# Altium PCB Buck.PcbDoc
Units mm, origin at the board's own origin, x right, y up, seen from the top; angles counter-clockwise.
Board outline 75.56 x 44.96 mm, 2 copper layers (Top Layer, Bottom Layer); 29 components, 16 nets, 87 pads, 62 vias.
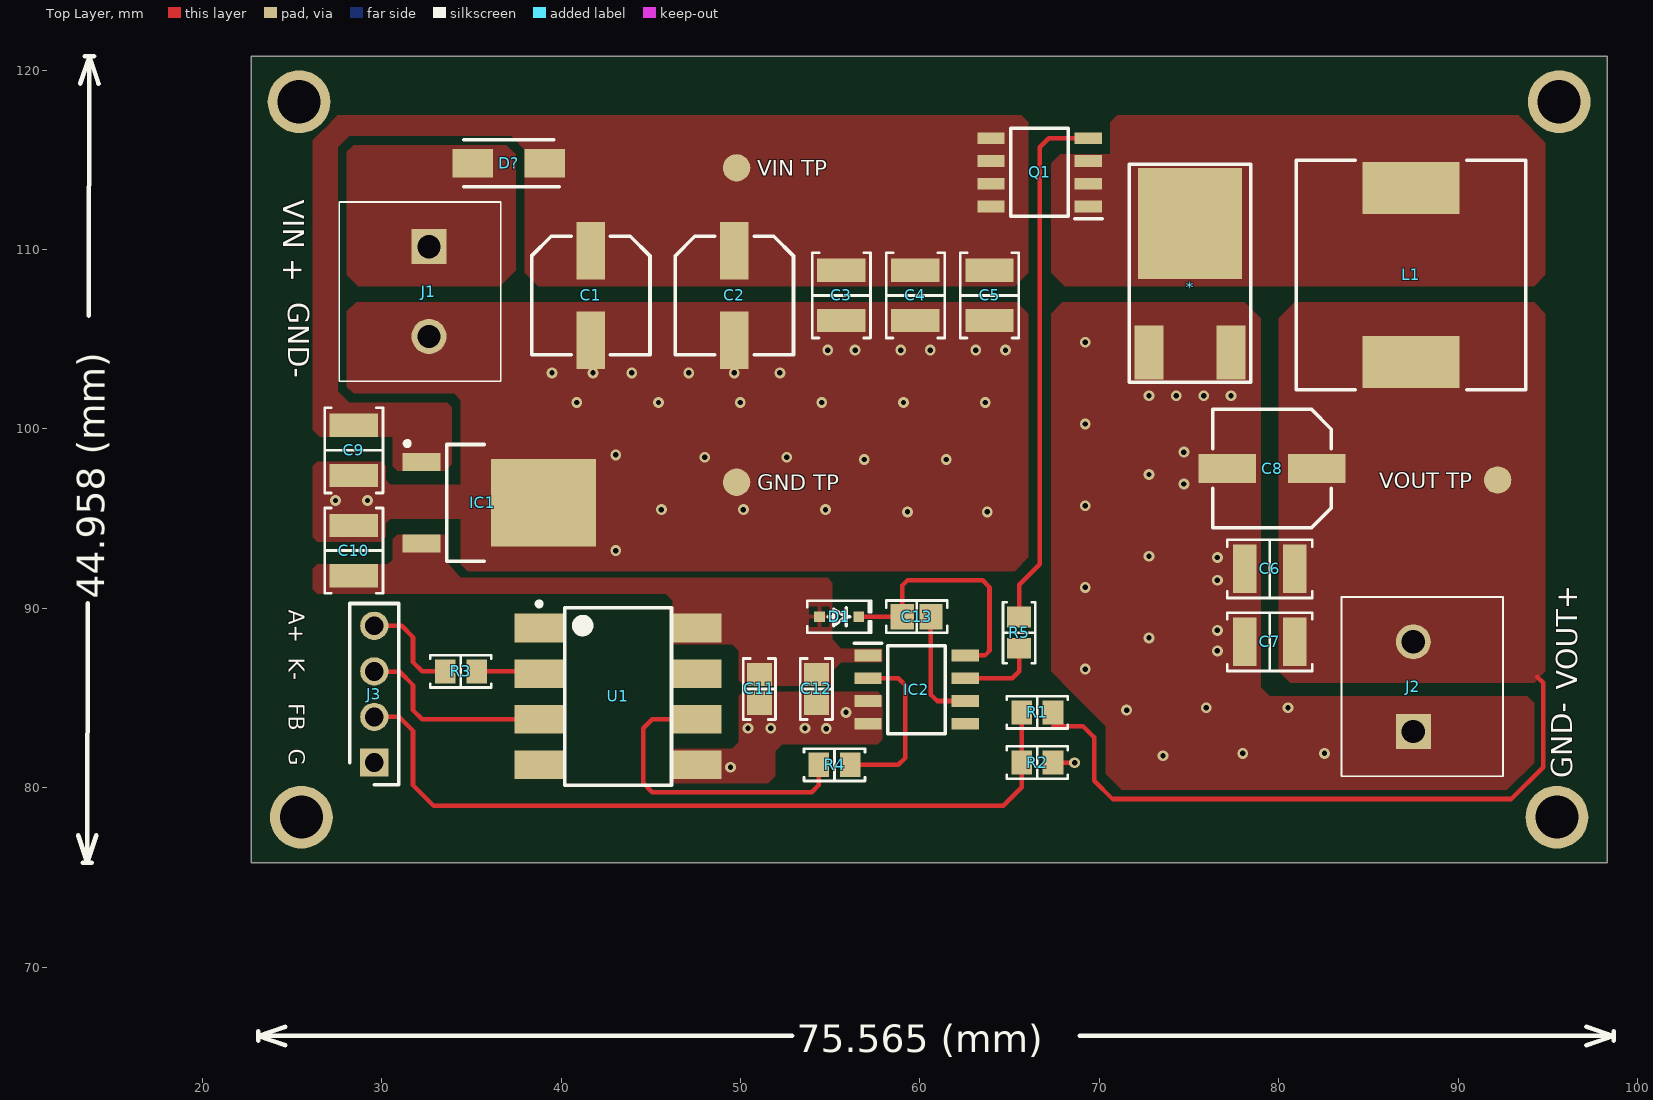
[diagram p0: Top Layer view]
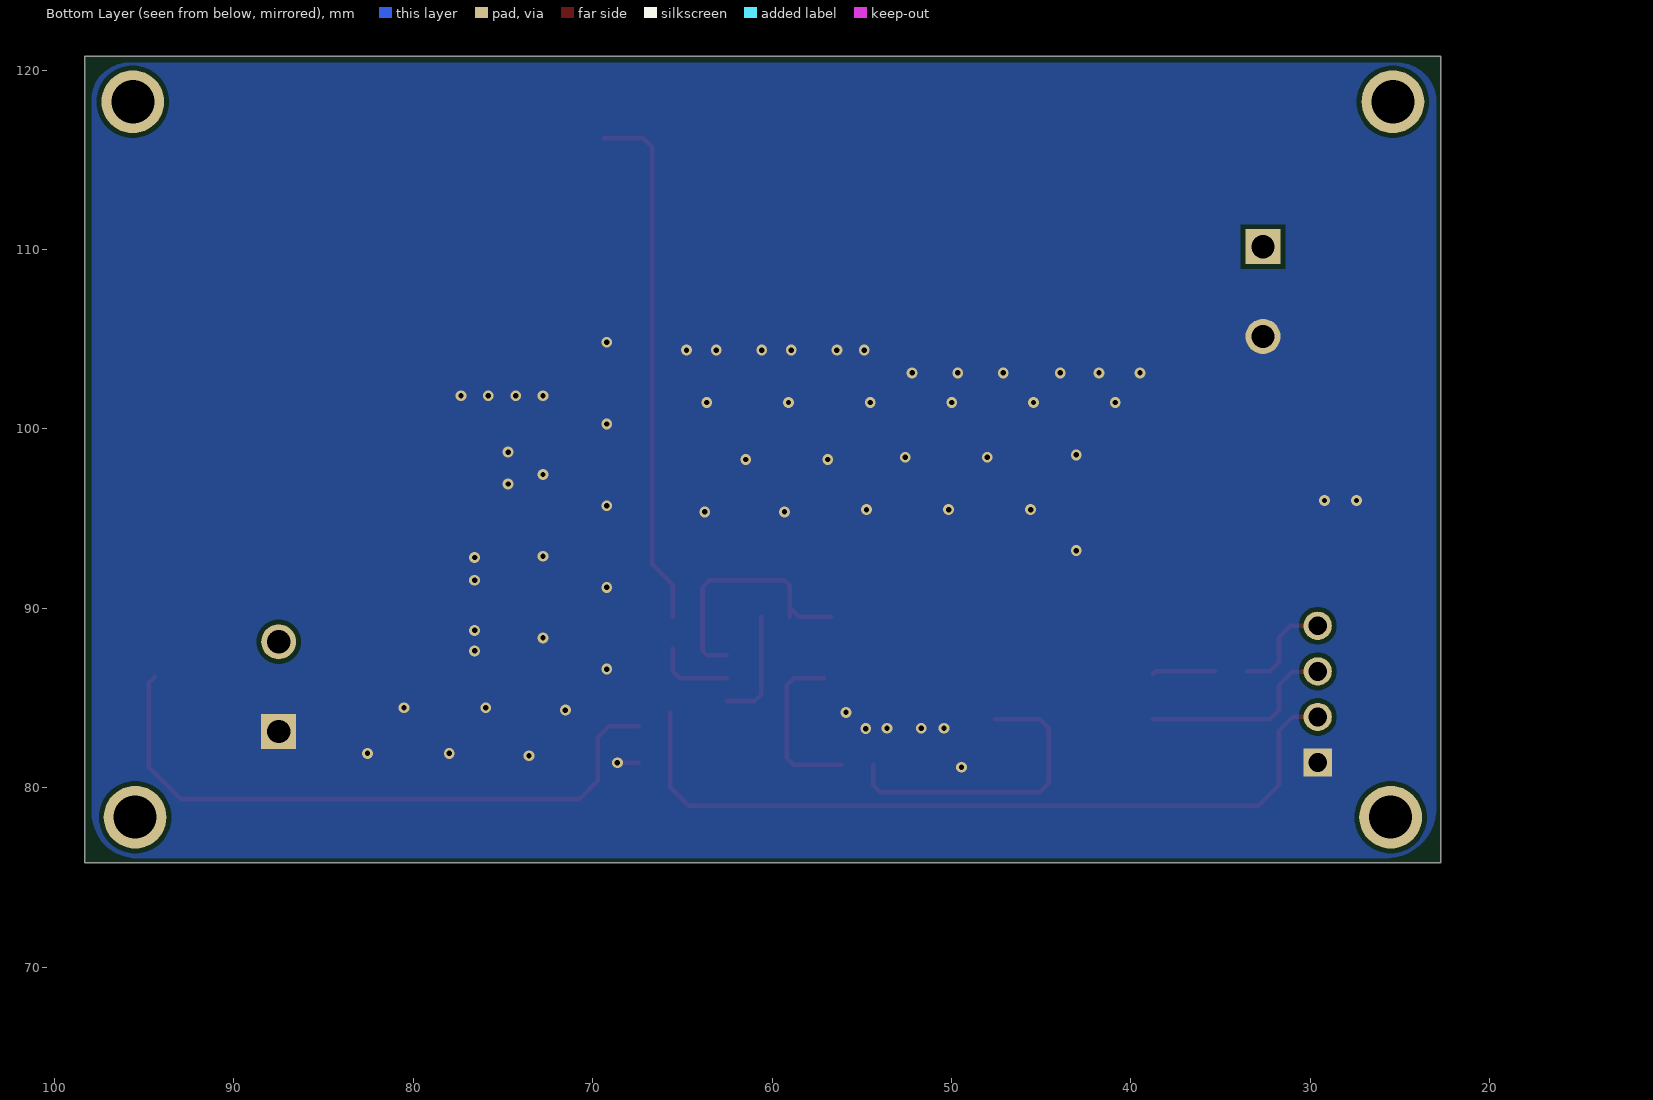
[diagram p1: Bottom Layer view, seen from below]
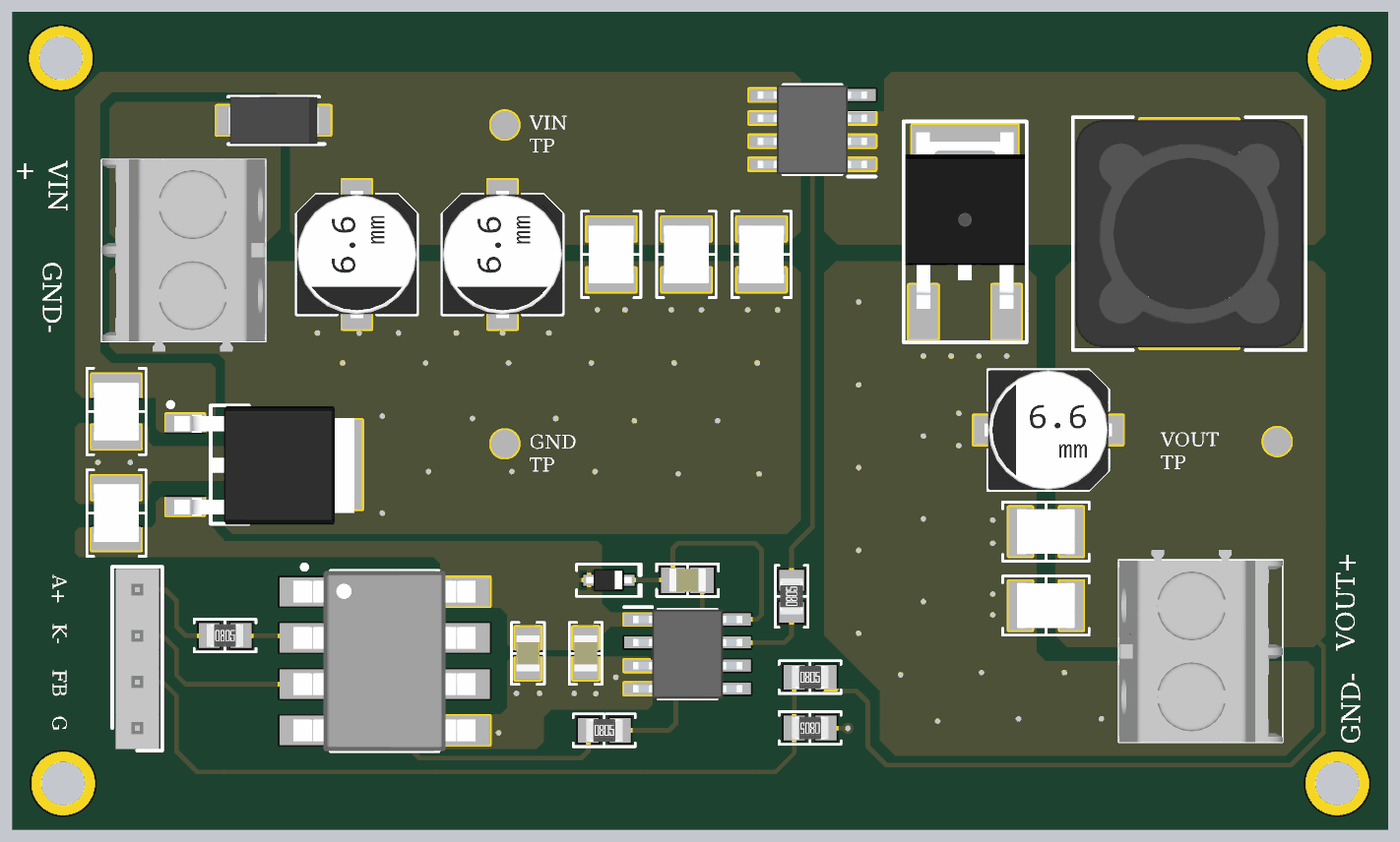
[diagram p2: 3D render of the assembled board from above, using the file's embedded part models]

## Layer stack, top to bottom
Top Solder: solder mask 0.0102, Solder Resist, Dk 3.5
Top Layer: signal copper 0.0356
Dielectric 1: dielectric 0.32, FR-4, Dk 4.8
Bottom Layer: signal copper 0.0356
Bottom Solder: solder mask 0.0102, Solder Resist, Dk 3.5

## Board outline
22.733,75.819 22.733,120.777 98.298,120.777 98.298,75.819

## Design rules (kind name [scope] priority, off if disabled: settings)
Clearance [All] p1: gap=0.254 ignorepadtopadclearanceinfootprint=FALSE except(0: Arc-Hole Track-Hole SMDPad-Hole THPad-Hole Via-Hole Fill-Hole Poly-Hole Region-Hole Text-Hole)
PolygonConnect [All] p1: connectstyle=Relief reliefconductorwidth=0.254 reliefentries=4 polygonreliefangle="90 Angle" airgapwidth=0.254
RoutingVias [All] p1: holewidth=0.711 width=1.27 viastyle="Through Hole" minholewidth=0.711 minwidth=1.27 maxholewidth=0.711 maxwidth=1.27
SolderMaskExpansion [All] p1: expansion=0.102 istentingtop=FALSE
Width [All] p1: maxlimit=0.254 minlimit=0.254 preferedwidth=0.254
30 further rules are at their usual default settings.

## Components (designator, comment, footprint, x,y, rotation, side; value= is the part's Value field where it differs from the comment)
* "MBR20100CD" SC_TO-252AA 75.057,111.447 r270 top
C1 "68µF" "CAP ALSMD 6.6MM H6.1MM" 41.656,107.442 r270 top
C2 "68µF" "CAP ALSMD 6.6MM H6.1MM" 49.657,107.442 r270 top
C3 "2.2 µF" "CAP 1210_3225 - 1MM" 55.626,107.442 r90 top
C4 "2.2 µF" "CAP 1210_3225 - 1MM" 59.753,107.442 r90 top
C5 "2.2 µF" "CAP 1210_3225 - 1MM" 63.881,107.442 r90 top
C6 "47 µF" "CAP 1210_3225 - 1MM" 79.502,92.202 r0 top
C7 "47 µF" "CAP 1210_3225 - 1MM" 79.502,88.138 r0 top
C8 "470µF" "CAP ALSMD 6.6MM H8.0MM" 79.629,97.79 r180 top
C9 "0.33 µF" "CAP 1210_3225 - 1MM" 28.448,98.806 r90 top
C10 "0.1 µF" "CAP 1210_3225 - 1MM" 28.448,93.221 r270 top
C11 "0.1 µF" "CAP 0805_2012" 51.054,85.509 r90 top
C12 "0.1 µF" "CAP 0805_2012" 54.229,85.509 r90 top
C13 "0.1 µF" "CAP 0805_2012" 59.817,89.535 r180 top
D1 "1N4148WS" SOD323F 55.499,89.535 r0 top
D? "RBR3L30BDDTE25" DIOM5026X220N 37.084,114.808 r180 top
IC1 "L78M12CDT" TO228P972X240-3N 36.576,95.885 r0 top
IC2 "IR2101S" SOIC127P600X175-8N 59.817,85.471 r0 top
J1 "1935161" 1935161 32.639,110.156 r270 top
J2 "1935161" 1935161 87.503,83.138 r90 top
J3 "0022032041" HDRV4W87P0X254_1X4_991X236X1155P 29.591,81.407 r90 top
L1 "6.8µH" "BOURNS SRR1280" 87.376,108.585 r270 top
Q1 "IRF7413PBF" SOIC127P600X175-8N 66.675,114.3 r180 top
R1 "100 kOhms" "RES 0805_2012" 66.548,84.201 r0 top
R2 "10 kOhms" "RES 0805_2012" 66.548,81.407 r180 top
R3 "220 Ohms" "RES 0805_2012" 34.417,86.487 r0 top
R4 "100 Ohms" "RES 0805_2012" 55.245,81.28 r0 top
R5 "220 Ohms" "RES 0805_2012" 65.532,88.646 r90 top
U1 "TLP350_TP1" SOP254P1000X425-8N 43.18,85.09 r0 top

## Footprints (in the part's own frame and the unit in brackets; to place one, negate y for a bottom-side part, rotate by r counter-clockwise, add the part's x,y. Pads: shape width x height; smd on the part's side, far side on the other; paste and mask are expansions set on the pad)
1935161 [mm]
  rect 1.95x1.95 hole 1.3: 1(0,0)
  round 1.95 hole 1.3: 2(5,0)
  silkscreen extent -2.5,-5 7.5,4, body extent -2.52,-5 8.05,4, height 12.22
"BOURNS SRR1280" [mm] "Precision Wire Wound Inductor, 2-Leads, Body 12.50x12.50mm, IPC Medium Density"
  rect 2.9x5.4 smd: 1(-4.85,0) 2(4.85,0)
  silkscreen extent -6.4,-6.4 6.4,6.4, body extent -6.25,-6.25 6.25,6.25, height 7.9
"CAP 0805_2012" [mm] "Chip Capacitor, 2-Leads, Body 2.00x1.20mm, IPC Medium Density"
  rect 1.3x1.4 smd: 1(-0.8,0) 2(0.8,0)
  silkscreen extent -1.7,-0.9 1.7,0.9, body extent -1,-0.64 1,0.64, height 1.26
"CAP 1210_3225 - 1MM" [mm] "Chip Capacitor, 2-Leads, Body 3.20x2.50mm, IPC Medium Density"
  rect 1.3x2.7 smd: 1(-1.4,0) 2(1.4,0)
  silkscreen extent -2.37,-1.63 2.37,1.63, body extent -1.6,-1.25 1.6,1.25, height 1
"CAP ALSMD 6.6MM H6.1MM" [mm] "Aluminum Electrolytic Capacitor, Body 6.60x6.60x6.10mm, IPC Low Density"
  rect 3.2x1.6 smd: 1(-2.5,0) 2(2.5,0)
  silkscreen extent -3.3,-3.3 3.3,3.3, body extent -3.5,-3.3 3.5,3.3, height 6.1
"CAP ALSMD 6.6MM H8.0MM" [mm] "Aluminum Electrolytic Capacitor, Body 6.60x6.60x8.0mm, IPC Low Density"
  rect 3.2x1.6 smd: 1(-2.5,0) 2(2.5,0)
  silkscreen extent -3.3,-3.3 3.3,3.3, body extent -3.5,-3.3 3.5,3.3, height 8
DIOM5026X220N [mm]
  rect 2.25x1.6 smd: 1(-2,0) 2(2,0)
  silkscreen extent -2.8,-1.3 2.5,1.3, body extent -2.5,-1.3 2.5,1.3, height 2.2
HDRV4W87P0X254_1X4_991X236X1155P [mm]
  rect 1.575x1.575 hole 1.05: 1(0,0)
  round 1.575 hole 1.05: 2(2.54,0) 3(5.08,0) 4(7.62,0)
  silkscreen extent -1.24,-1.37 8.86,1.37, body extent -1.15,-1.19 8.75,1.17, height 10.66
"RES 0805_2012" [mm] "Chip Resistor, 2-Leads, Body 2.00x1.25mm, IPC Medium Density"
  rect 1.15x1.35 smd: 1(-0.875,0) 2(0.875,0)
  silkscreen extent -1.7,-0.9 1.7,0.9, body extent -1,-0.62 1,0.63, height 0.6
SC_TO-252AA [mm] "D-PAK"
  rect 3x1.6 smd: 1(7.18,-2.286) 2(7.18,2.286)
  rect 6.2x5.8 smd: 3(0,0)
  silkscreen extent -3.3,-3.38 8.84,3.38, body extent -2.7,-3.29 7,3.29, height 2.3
SOD323F [mm] "SODFL, 2-Leads, Body 1.25x2.50mm, IPC Medium Density"
  rect 0.6x0.6 smd: 1(-1.1,0) 2(1.1,0)
  silkscreen extent -1.78,-0.89 1.78,0.89, body extent -1.25,-0.62 1.25,0.63, height 0.8
SOIC127P600X175-8N [mm]
  rect 1.525x0.65 smd: 1(-2.712,1.905) 2(-2.712,0.635) 3(-2.712,-0.635) 4(-2.712,-1.905) 5(2.712,-1.905) 6(2.712,-0.635) 7(2.712,0.635) 8(2.712,1.905)
  silkscreen extent -3.47,-2.45 1.6,2.58, body extent -3,-2.45 3,2.45, height 1.75
SOP254P1000X425-8N [mm] "SOP, 8-Leads, Body 9.66x6.40mm, Pitch 2.54mm, IPC Medium Density"
  rect 2.75x1.6 smd: 1(-4.4,3.81) 2(-4.4,1.27) 3(-4.4,-1.27) 4(-4.4,-3.81) 5(4.4,-3.81) 6(4.4,-1.27) 7(4.4,1.27) 8(4.4,3.81)
  silkscreen extent -4.52,-4.95 2.98,5.28, body extent -5,-4.95 5,4.95, height 4.25
TO228P972X240-3N [mm]
  rect 2.1x1 smd: 1(-4.35,2.28) 3(-4.35,-2.28)
  rect 5.85x4.9 smd: 4(2.45,0)
  silkscreen extent -5.27,-3.25 -0.85,3.42, body extent -4.95,-3.3 4.95,3.22, height 2.25

## Part data
C1 C2: library part UWD1E680MCL1GS, "CAP ALUM 68UF 20% 25V SMD", Device Package="Radial, Can - SMD", Lifetime @ Temp.="2000 Hrs @ 105°C", Manufacturer=Nichicon, Operating Temperature="-55°C ~ 105°C", Ripple Current @ High Frequency="230mA @ 100kHz", Ripple Current @ Low Frequency="115mA @ 120Hz", Supplier Part Number 1=493-9673-1-ND, Tolerance=±20%, Voltage - Rated=25V, Applications="General Purpose", Capacitance=68µF, ComponentLink1Description=Datasheet, ComponentLink1URL=http://nichicon-us.com/english/products/pdfs/e-uwd.pdf, ComponentLink2Description="DigiKey Link", ComponentLink2URL=http://digikey.com/product-detail/en/nichicon/UWD1E680MCL1GS/493-9673-1-ND/3963005, Height - Seated (Max)="0.228\" (5.80mm)", Impedance="440 mOhms", LastUpdated="1/21/2020 2:33:32 AM", Lifecycle Status=Active, Minimum Order=1, Mounting Type="Surface Mount", Package / Case="Radial, Can - SMD", Packaging=TapeAndReel, Part Number=UWD1E680MCL1GS, Part Status=Active, PartId=8861, Price=0.22, Series=UWD, Size / Dimension="0.248\" Dia (6.30mm)", Supplier 1=DigiKey, Surface Mount Land Size="0.260\" L x 0.260\" W (6.60mm x 6.60mm)"
C3 C4 C5: library part TMF325B7225KMHP, "CAP CER 2.2UF 25V X7R 1210", Device Package="1210 (3225 Metric)", Manufacturer="Taiyo Yuden", Operating Temperature="-55°C ~ 125°C", Ratings=AEC-Q200, Supplier Part Number 1=587-6463-1-ND, Temperature Coefficient=X7R, Tolerance=±10%, Voltage - Rated=25V, Applications="Automotive, SMPS Filtering", Capacitance="2.2 µF", ComponentLink1Description=Datasheet, ComponentLink1URL=https://ds.yuden.co.jp/TYCOMPAS/ut/detail?pn=TMF325B7225KMHP&u=M, ComponentLink2Description="DigiKey Link", ComponentLink2URL=https://www.digikey.com/en/products/detail/taiyo-yuden/TMF325B7225KMHP/10379029, LastUpdated="9/19/2022 01:23:29 PM", Lifecycle Status=Active, Minimum Order=1, Mounting Type="Surface Mount, MLCC", Package / Case="1210 (3225 Metric)", Packaging=TapeAndReel, Part Number=TMF325B7225KMHP, Part Status=Active, PartId=23880, Price=0.17, Series=M, Size / Dimension="0.126\" L x 0.098\" W (3.20mm x 2.50mm)", Supplier 1=DigiKey, Thickness (Max)="0.106\" (2.70mm)"
C6 C7: library part GRM32ED71A476KE15L, "CAP CER 47UF 10V X7T 1210", Part Number=GRM32ED71A476KE15L
C8: library part EMZR100ARA471MF80G, "CAP ALUM 470UF 20% 10V SMD", Device Package="Radial, Can - SMD", ESR (Equivalent Series Resistance)="160 mohm @ 100kHz", Lifetime @ Temp.="2000 Hrs @ 105°C", Manufacturer="United Chemi-Con", Operating Temperature="-55°C ~ 105°C", Ratings=AEC-Q200, Ripple Current @ High Frequency="600mA @ 100kHz", Ripple Current @ Low Frequency="300mA @ 120Hz", Supplier Part Number 1=565-5133-1-ND, Tolerance=±20%, Voltage - Rated=10V, Applications=Automotive, Capacitance=470µF, ComponentLink1Description=Datasheet, ComponentLink1URL=http://www.chemi-con.co.jp/cgi-bin/CAT_DB/SEARCH/cat_db_al.cgi?e=e&j=p&pdfname=mzr, ComponentLink2Description="DigiKey Link", ComponentLink2URL=http://digikey.com/product-detail/en/united-chemi-con/EMZR100ARA471MF80G/565-5133-1-ND/8637128, Height - Seated (Max)="0.315\" (8.00mm)", LastUpdated="1/21/2020 4:06:45 AM", Lifecycle Status=Active, Minimum Order=1, Mounting Type="Surface Mount", Package / Case="Radial, Can - SMD", Packaging=TapeAndReel, Part Number=EMZR100ARA471MF80G, Part Status=Active, PartId=8433, Polarization=Polar, Price=0.20, Series="Alchip™- MZR", Size / Dimension="0.248\" Dia (6.30mm)", Supplier 1=DigiKey, Surface Mount Land Size="0.260\" L x 0.260\" W (6.60mm x 6.60mm)"
C9: library part 885012209044, "CAP CER 0.33UF 50V X7R 1210", Device Package="1210 (3225 Metric)", Manufacturer="Würth Elektronik", Operating Temperature="-55°C ~ 125°C", Supplier Part Number 1=732-7741-1-ND, Temperature Coefficient=X7R, Tolerance=±10%, Voltage - Rated=50V, Applications="General Purpose", Capacitance="0.33 µF", ComponentLink1Description=Datasheet, ComponentLink1URL=https://katalog.we-online.de/pbs/datasheet/885012209044.pdf, ComponentLink2Description="DigiKey Link", ComponentLink2URL=https://www.digikey.com/en/products/detail/würth-elektronik/885012209044/5453596, LastUpdated="9/19/2022 01:23:29 PM", Lifecycle Status=Active, Minimum Order=1, Mounting Type="Surface Mount, MLCC", Package / Case="1210 (3225 Metric)", Packaging=TapeAndReel, Part Number=885012209044, Part Status=Active, PartId=25056, Price=0.36, Series=WCAP-CSGP, Size / Dimension="0.126\" L x 0.098\" W (3.20mm x 2.50mm)", Supplier 1=DigiKey, Thickness (Max)="0.053\" (1.35mm)"
C10: library part UMF325B7104KNHT, "CAP CER 0.1UF 50V X7R 1210", Device Package="1210 (3225 Metric)", Manufacturer="Taiyo Yuden", Operating Temperature="-55°C ~ 125°C", Ratings=AEC-Q200, Supplier Part Number 1=587-6477-1-ND, Temperature Coefficient=X7R, Tolerance=±10%, Voltage - Rated=50V, Applications="Automotive, SMPS Filtering", Capacitance="0.1 µF", ComponentLink1Description=Datasheet, ComponentLink1URL=https://ds.yuden.co.jp/TYCOMPAS/ut/detail?pn=UMF325B7104KNHT&u=M, ComponentLink2Description="DigiKey Link", ComponentLink2URL=https://www.digikey.com/en/products/detail/taiyo-yuden/UMF325B7104KNHT/10379043, LastUpdated="9/19/2022 01:23:27 PM", Lifecycle Status=Active, Minimum Order=1, Mounting Type="Surface Mount, MLCC", Package / Case="1210 (3225 Metric)", Packaging=TapeAndReel, Part Number=UMF325B7104KNHT, Part Status=Active, PartId=24590, Price=0.12, Series=M, Size / Dimension="0.126\" L x 0.098\" W (3.20mm x 2.50mm)", Supplier 1=DigiKey, Thickness (Max)="0.083\" (2.10mm)"
C11 C12 C13: library part CC0805MRX7R9BB104, "CAP CER 0.1UF 50V X7R 0805", Device Package="0805 (2012 Metric)", Manufacturer=Yageo, Operating Temperature="-55°C ~ 125°C", Supplier Part Number 1=311-4351-1-ND, Temperature Coefficient=X7R, Tolerance=±20%, Voltage - Rated=50V, Applications="General Purpose", Capacitance="0.1 µF", ComponentLink1Description=Datasheet, ComponentLink1URL=https://www.yageo.com/upload/media/product/productsearch/datasheet/mlcc/UPY-GPHC_X7R_6.3V-to-50V_18.pdf, ComponentLink2Description="DigiKey Link", ComponentLink2URL=https://www.digikey.com/en/products/detail/yageo/CC0805MRX7R9BB104/5884281, LastUpdated="9/19/2022 01:04:26 PM", Lifecycle Status=Active, Minimum Order=1, Mounting Type="Surface Mount, MLCC", Package / Case="0805 (2012 Metric)", Packaging=TapeAndReel, Part Number=CC0805MRX7R9BB104, Part Status=Active, PartId=2475, Price=0.02, Series=CC, Size / Dimension="0.079\" L x 0.049\" W (2.00mm x 1.25mm)", Supplier 1=DigiKey, Thickness (Max)="0.037\" (0.95mm)"
D1: "DIODE GEN PURP 75V 150MA SOD323F", Part Number=1N4148WS
D?: "Schottky Diode", Manufacturer_Name="ROHM Semiconductor", Mouser Part Number=755-RBR3L30BDDTE25, Datasheet Link=https://fscdn.rohm.com/en/products/databook/datasheet/discrete/diode/schottky_barrier/rbr3l30bddte25-e.pdf, Height=2.2mm, Manufacturer_Part_Number=RBR3L30BDDTE25, Mouser Price/Stock=https://www.mouser.co.uk/ProductDetail/ROHM-Semiconductor/RBR3L30BDDTE25?qs=4v%252BiZTmLVHEWHyOjRRmz3Q%3D%3D
IC1: "Integrated Circuit", Manufacturer_Name=STMicroelectronics, Mouser Part Number=511-L78M12CDT, Datasheet Link=http://www.st.com/st-web-ui/static/active/en/resource/technical/document/datasheet/CD00000447.pdf, Height=2.4mm, Manufacturer_Part_Number=L78M12CDT, Mouser Price/Stock=https://www.mouser.co.uk/ProductDetail/STMicroelectronics/L78M12CDT?qs=hUhhBvpTJN9yD9OLpyEzTA%3D%3D
IC2: "Integrated Circuit", Manufacturer_Name=Infineon, Datasheet Link=https://pdf1.alldatasheet.com/datasheet-pdf/view/102221/IRF/IR2101S.html, Height=1.75mm, Manufacturer_Part_Number=IR2101S
J1 J2: "Connector", Manufacturer_Name="Phoenix Contact", Mouser Part Number=651-1935161, Arrow Part Number=1935161, Arrow Price/Stock=https://www.arrow.com/en/products/1935161/phoenix-contact?region=nac, Datasheet Link=https://datasheet.datasheetarchive.com/originals/distributors/SFDatasheet-2/sf-00057459.pdf, Height=11.55mm, Manufacturer_Part_Number=1935161, Mouser Price/Stock=https://www.mouser.co.uk/ProductDetail/Phoenix-Contact/1935161?qs=W3wJikR1%252BS6eKzfFl8Rbew%3D%3D
J3: "Connector", Manufacturer_Name=Molex, Mouser Part Number=N/A, Arrow Part Number=0022032041, Arrow Price/Stock=https://www.arrow.com/en/products/0022032041/molex, Datasheet Link=http://www.molex.com/pdm_docs/sd/022032041_sd.pdf, Height=11.55mm, Manufacturer_Part_Number=0022032041, Mouser Price/Stock=https://www.mouser.co.uk/ProductDetail/Molex/0022032041?qs=PBcRNPEHKsrt5pJfEqGMHQ%3D%3D
L1: library part SRR1280-6R8Y, "FIXED IND 6.8UH 7.6A 18.5MOHM SM", Current - Saturation=8A, Current Rating (Amps)=7.6A, DC Resistance (DCR)="18.5mOhm Max", Device Package=Nonstandard, Frequency - Self Resonant=22MHz, Inductance Frequency - Test=100kHz, Manufacturer="Bourns Inc.", Operating Temperature="-40°C ~ 125°C", Q @ Freq="20 @ 7.96MHz", Supplier Part Number 1=SRR1280-6R8YCT-ND, Tolerance=±30%, ComponentLink1Description=Datasheet, ComponentLink1URL=https://www.bourns.com/docs/Product-Datasheets/SRR1280.pdf, ComponentLink2Description="DigiKey Link", ComponentLink2URL=http://digikey.com/product-detail/en/bourns-inc/SRR1280-6R8Y/SRR1280-6R8YCT-ND/3986771, Height - Seated (Max)="0.315\" (8.00mm)", Inductance=6.8µH, LastUpdated="1/21/2020 3:25:29 AM", Lifecycle Status=Active, Material - Core=Ferrite, Minimum Order=1, Mounting Type="Surface Mount", Package / Case=Nonstandard, Packaging=TapeAndReel, Part Number=SRR1280-6R8Y, Part Status=Active, PartId=41, Price=0.65, Series=SRR1280, Shielding=Shielded, Size / Dimension="0.492\" L x 0.492\" W (12.50mm x 12.50mm)", Supplier 1=DigiKey, Type=Wirewound
Q1: "MOSFET (N-Channel)", Manufacturer_Name=Infineon, Mouser Part Number=942-IRF7413PBF, Arrow Part Number=IRF7413PBF, Arrow Price/Stock=https://www.arrow.com/en/products/irf7413pbf/infineon-technologies-ag, Datasheet Link=https://www.infineon.com/dgdl/Infineon-IRF7413-DataSheet-v01_01-EN.pdf?fileId=5546d462533600a4015355fa8e901bb8, Height=1.75mm, Manufacturer_Part_Number=IRF7413PBF, Mouser Price/Stock=https://www.mouser.co.uk/ProductDetail/Infineon-IR/IRF7413PBF?qs=am%252BH1kEnjyaqXaR%2F2xDamA%3D%3D
R1: library part CPF0805B100KE, "RES SMD 100K OHM 0.1% 1/10W 0805", Device Package="0805 (2012 Metric)", Manufacturer="TE Connectivity Passive Product", Operating Temperature="-55°C ~ 155°C", Power (Watts)="0.1W, 1/10W", Supplier Device Package=0805, Supplier Part Number 1=A106042CT-ND, Temperature Coefficient=±25ppm/°C, Tolerance=±0.1%, ComponentLink1Description=Datasheet, ComponentLink1URL=https://www.te.com/commerce/DocumentDelivery/DDEController?Action=srchrtrv&DocNm=1773200&DocType=DS&DocLang=English, ComponentLink2Description="DigiKey Link", ComponentLink2URL=https://www.digikey.com/en/products/detail/te-connectivity-passive-product/CPF0805B100KE/2389788, Composition="Thin Film", Height - Seated (Max)="0.026\" (0.65mm)", LastUpdated="9/19/2022 01:36:59 PM", Lifecycle Status=Active, Minimum Order=1, Number of Terminations=2, Package / Case="0805 (2012 Metric)", Packaging=TapeAndReel, Part Number=CPF0805B100KE, Part Status=Active, PartId=27729, Price=0.10, Resistance="100 kOhms", Series="CPF, Neohm", Size / Dimension="0.079\" L x 0.049\" W (2.00mm x 1.25mm)", Supplier 1=DigiKey
R2: library part RNCS0805BKE10K0, "RES 10K OHM 0.1% 1/10W 0805", Device Package="0805 (2012 Metric)", Manufacturer="Stackpole Electronics Inc", Operating Temperature="-55°C ~ 155°C", Power (Watts)="0.1W, 1/10W", Ratings=AEC-Q200, Supplier Device Package=0805, Supplier Part Number 1=RNCS0805BKE10K0CT-ND, Temperature Coefficient=±25ppm/°C, Tolerance=±0.1%, ComponentLink1Description=Datasheet, ComponentLink1URL=https://www.seielect.com/catalog/sei-rncs_rnch.pdf, ComponentLink2Description="DigiKey Link", ComponentLink2URL=https://www.digikey.com/en/products/detail/stackpole-electronics-inc/RNCS0805BKE10K0/1800067, Composition="Thin Film", Features="Anti-Corrosive, Automotive AEC-Q200, Moisture Resistant", Height - Seated (Max)="0.026\" (0.65mm)", LastUpdated="9/19/2022 01:36:59 PM", Lifecycle Status=Active, Minimum Order=1, Number of Terminations=2, Package / Case="0805 (2012 Metric)", Packaging=TapeAndReel, Part Number=RNCS0805BKE10K0, Part Status=Active, PartId=27713, Price=0.09, Resistance="10 kOhms", Series=RNCS, Size / Dimension="0.079\" L x 0.049\" W (2.00mm x 1.25mm)", Supplier 1=DigiKey
R3 R5: library part ESR10EZPF2200, "RES SMD 220 OHM 1% 0.4W 0805", Device Package="0805 (2012 Metric)", Manufacturer="Rohm Semiconductor", Operating Temperature="-55°C ~ 155°C", Power (Watts)="0.4W, 2/5W", Ratings=AEC-Q200, Supplier Device Package=0805, Supplier Part Number 1=RHM220AECT-ND, Temperature Coefficient=±100ppm/°C, Tolerance=±1%, ComponentLink1Description=Datasheet, ComponentLink1URL=https://www.rohm.com/datasheet/ESR01MZPF/esr-e, ComponentLink2Description="DigiKey Link", ComponentLink2URL=https://www.digikey.com/en/products/detail/rohm-semiconductor/ESR10EZPF2200/1983511, Composition="Thick Film", Features="Automotive AEC-Q200, Pulse Withstanding", Height - Seated (Max)="0.026\" (0.65mm)", LastUpdated="9/19/2022 01:36:58 PM", Lifecycle Status=Active, Minimum Order=1, Number of Terminations=2, Package / Case="0805 (2012 Metric)", Packaging=TapeAndReel, Part Number=ESR10EZPF2200, Part Status=Active, PartId=28037, Price=0.02, Resistance="220 Ohms", Series=ESR, Size / Dimension="0.079\" L x 0.049\" W (2.00mm x 1.25mm)", Supplier 1=DigiKey
R4: library part RCS0805100RFKEA, "RES SMD 100 OHM 1% 1/2W 0805", Device Package="0805 (2012 Metric)", Manufacturer="Vishay Dale", Operating Temperature="-55°C ~ 155°C", Power (Watts)="0.5W, 1/2W", Ratings=AEC-Q200, Supplier Device Package=0805, Supplier Part Number 1=541-2834-1-ND, Temperature Coefficient=±100ppm/°C, Tolerance=±1%, ComponentLink1Description=Datasheet, ComponentLink1URL=http://www.vishay.com/docs/20065/rcse3.pdf, ComponentLink2Description="DigiKey Link", ComponentLink2URL=https://www.digikey.com/en/products/detail/vishay-dale/RCS0805100RFKEA/5866980, Composition="Thick Film", Features="Automotive AEC-Q200, Pulse Withstanding", Height - Seated (Max)="0.020\" (0.50mm)", LastUpdated="9/19/2022 01:36:59 PM", Lifecycle Status=Active, Minimum Order=1, Number of Terminations=2, Package / Case="0805 (2012 Metric)", Packaging=TapeAndReel, Part Number=RCS0805100RFKEA, Part Status=Active, PartId=27784, Price=0.02, Resistance="100 Ohms", Series="RCS e3", Size / Dimension="0.079\" L x 0.049\" W (2.00mm x 1.25mm)", Supplier 1=DigiKey

## Free pads (board coordinates)
  round 3.5 hole 2.4: 3(25.4,118.237) 3(25.527,78.359) 3(95.504,78.359) 3(95.631,118.237)
  round 1.524 smd: ""(49.784,97.028) ""(49.784,114.554) ""(92.202,97.155)

## Via types
v1: diameter 0.6, hole 0.3, Top Layer to Bottom Layer, tented top, 62 vias

## Nets (pads, with @x,y where several pads share a name; then routed paths per layer and width w, separated by ;. In a path a pad name is that pad's centre, name@x,y a point inside that pad or via, vN(x,y) a via of type N, cw(c..) or ccw(c..) an arc to the next point about the centre after c; other vN are vias at no path point)
12V: C10.2 C11.2 C12.2 D1.1 IC1.3 IC2.1 U1.8
GATE_DRIVE_HIN: IC2.2 R4.2 | length 9.5
  Top Layer w0.254: R4.2 58.801,81.28 59.182,81.661 59.182,85.725 58.801,86.106 IC2.2
GATE_DRIVE_HO: Q1.4 R5.2 | length 29.6
  Top Layer w0.254: R5.2 65.532,91.313 66.675,92.456 66.675,115.697 67.183,116.205 Q1.4
GND: *.1 *.2 C1.2 C2.2 C3.1 C4.1 C5.1 C6.1 C7.1 C8.2 C9.1 C10.1 C11.1 C12.1 IC1.4 IC2.3 IC2.4 J1.2 J2.1 J3.1 pad.@49.784,97.028 R2.1 U1.5 | length 1.2
  Top Layer w0.254: R2.1 67.437,81.393 v1(68.624,81.393)
  other v1: 49.447,81.139 73.551,81.788 77.996,81.915 82.55,81.915 54.781,83.298 50.419,83.312 51.689,83.312 53.594,83.312 55.88,84.201 71.519,84.328 75.964,84.455 80.518,84.455 69.215,86.614 76.581,87.63 72.771,88.355 76.581,88.773 69.215,91.168 76.581,91.567 76.581,92.837 72.771,92.909 43.053,93.218 59.309,95.377 63.754,95.377 45.593,95.504 50.165,95.504 54.737,95.504 69.215,95.721 27.432,96.012 29.21,96.012 74.718,96.933 72.771,97.462 56.896,98.298 61.468,98.298 48.006,98.425 52.578,98.425 43.053,98.552 74.718,98.711 69.215,100.275 40.876,101.473 45.429,101.473 49.983,101.473 54.536,101.473 59.09,101.473 63.643,101.473 72.771,101.854 74.295,101.854 75.819,101.854 77.343,101.854 39.497,103.124 41.783,103.124 43.942,103.124 47.117,103.124 49.657,103.124 52.197,103.124 54.864,104.394 56.388,104.394 58.928,104.394 60.579,104.394 63.119,104.394 64.77,104.394 69.215,104.828
NetC13_1: C13.1 IC2.6 | length 6.4
  Top Layer w0.254: C13.1 60.617,85.179 60.96,84.836 IC2.6
NetC13_2: C13.2 D1.2 IC2.8 | length 14.4
  Top Layer w0.254: D1.2@56.71,89.535 58.509,89.535 C13.2@59.017,90.043 ; C13.2 C13.2@59.017,90.043 ; IC2.8 63.627,87.376 63.881,87.63 63.881,91.186 63.5,91.567 59.309,91.567 59.017,91.275 C13.2@59.017,90.043
NetD?_2: D?.2 J1.1
NetIC2_7: IC2.7 R5.1 | length 4.4
  Top Layer w0.254: IC2.7 65.151,86.106 65.532,86.487 R5.1
NetR3_2: R3.2 U1.2 | length 3.5
  Top Layer w0.254: R3.2 38.653,86.487 U1.2
NetR4_1: R4.1 U1.6 | length 17.6
  Top Layer w0.254: U1.6 45.085,83.82 44.577,83.312 44.577,80.264 45.085,79.756 53.975,79.756 54.37,80.151 R4.1
STM_32_GND: J3.3 U1.3 | length 11.1
  Top Layer w0.254: J3.3 29.617,86.461 31.014,86.461 31.75,85.725 31.75,84.328 32.258,83.82 U1.3
STM_32_INPUT: J3.4 R3.1 | length 5.8
  Top Layer w0.254: J3.4 31.115,89.027 31.75,88.392 31.75,86.995 32.258,86.487 R3.1
SW_NODE: *.3 L1.1 Q1.1 Q1.2 Q1.3
V_FB: J3.2 R1.1 R2.2 | length 44.5
  Top Layer w0.254: J3.2 30.988,83.947 31.75,83.185 31.75,80.137 32.893,78.994 64.643,78.994 65.673,80.024 R2.2 R1.1
VIN: C1.1 C2.1 C3.2 C4.2 C5.2 C9.2 D?.1 IC1.1 pad.@49.784,114.554 Q1.5 Q1.6 Q1.7 Q1.8
VOUT: C6.2 C7.2 C8.1 J2.2 L1.2 pad.@92.202,97.155 R1.2 | length 36.3
  Top Layer w0.254: 67.423,83.439 69.088,83.439 69.723,82.804 69.723,80.391 70.739,79.375 92.964,79.375 94.742,81.153 94.742,85.852 94.398,86.196
pads on no net: IC2.5 U1.1 U1.4 U1.7

## Polygon pours and split planes (outlines as drawn)
GND on Top Layer "GND_L01_P028" (solid, pour order 28): 70.358,83.439 70.358,80.772 71.247,79.883 92.71,79.883 94.234,81.407 94.234,84.709 93.853,85.09 79.502,85.09 78.994,85.598 78.994,85.725 78.74,85.979 67.818,85.979
VIN on Top Layer "VIN_L01_P010" (solid, pour order 10): 33.909,100.838 33.909,98.044 33.528,97.663 30.861,97.663 30.607,97.917 30.607,100.838
12V on Top Layer "12V_L01_P026" (solid, pour order 26): 26.416,92.456 30.353,92.456 30.607,92.71 30.607,93.853 30.861,94.107 33.528,94.107 33.655,93.98 33.655,92.535 34.629,91.44 26.162,91.44 26.162,92.202
NetD?_2 on Top Layer "NETD?_2_L01_P021" (solid, pour order 21): 37.465,115.316 37.465,108.839 36.576,107.95 28.702,107.95 28.067,108.585 28.067,115.443 28.448,115.824 36.957,115.824
12V on Top Layer "12V_L01_P025" (solid, pour order 25): 55.118,91.44 55.118,88.265 55.626,87.757 57.912,87.757 57.912,86.995 55.626,86.995 55.118,86.487 55.118,85.679 50.211,85.679 49.911,85.979 49.911,87.63 49.53,88.011 46.228,88.011 46.228,90.424 45.847,90.805 26.416,90.805 26.162,91.059 26.162,91.694 54.864,91.694
GND on Top Layer "GND_L01_P024" (solid, pour order 24): 50.165,85.344 56.388,85.344 57.658,85.344 57.912,85.09 57.912,82.677 57.658,82.423 52.324,82.423 51.943,82.042 51.943,80.645 51.562,80.264 46.355,80.264 46.101,80.518 46.101,81.915 46.355,82.169 49.53,82.169 49.911,82.55 49.911,85.09
VIN on Top Layer "VIN_L01_P023" (solid, pour order 23): 28.194,117.475 27.559,117.475 27.178,117.094 27.178,115.697 27.559,115.697 28.194,116.332
VIN on Top Layer "VIN_L01_P022" (solid, pour order 22): 37.973,117.475 28.194,117.475 28.194,116.332 37.211,116.332 38.1,115.443 38.608,115.443 38.608,117.475
VIN on Top Layer "VIN_L01_P006" (solid, pour order 6): 26.162,116.078 26.162,99.949 26.543,99.568 33.909,99.568 33.909,101.219 33.655,101.473 28.194,101.473 27.559,102.108 27.559,117.475
VIN on Top Layer "VIN_L01_P000" (solid, pour order 0): 37.973,117.475 37.973,108.712 38.735,107.95 65.278,107.95 66.04,108.712 66.04,117.094 65.659,117.475
SW_NODE on Top Layer "SW_NODE_L01_P002" (solid, pour order 2): 75.565,115.316 67.818,115.316 67.31,114.808 67.31,108.712 68.072,107.95 75.565,107.95
GND on Top Layer "GND_L01_P016" (solid, pour order 16): 67.945,107.061 78.105,107.061 78.994,106.172 78.994,85.217 68.58,85.217 67.31,86.487 67.31,106.426
GND on Top Layer "GND_L01_P015" (solid, pour order 15): 28.067,106.553 28.067,102.362 28.448,101.981 34.036,101.981 34.417,101.6 34.417,92.456 34.798,92.075 65.278,92.075 66.04,92.837 66.04,106.426 65.405,107.061 28.575,107.061
VOUT on Top Layer "VOUT_L01_P017" (solid, pour order 17): 80.899,107.061 94.234,107.061 94.869,106.426 94.869,86.487 94.234,85.852 80.645,85.852 80.01,86.487 80.01,106.172
GND on Top Layer "GND_L01_P009" (solid, pour order 9): 26.416,98.171 29.972,98.171 30.226,97.917 30.226,97.155 30.48,96.901 37.211,96.901 37.211,94.996 30.48,94.996 30.226,94.742 30.226,93.98 29.972,93.726 26.416,93.726 26.162,93.98 26.162,97.917
SW_NODE on Top Layer "SW_NODE_L01_P004" (solid, pour order 4): 75.696,117.475 70.993,117.475 70.612,117.094 70.612,111.887 74.168,111.887 75.696,111.887
SW_NODE on Top Layer "SW_NODE_L01_P001" (solid, pour order 1): 74.803,117.475 74.803,107.95 94.234,107.95 94.869,108.585 94.869,115.951 93.345,117.475
GND on Bottom Layer "GND_L02_P007" (solid, pour order 7): 25.146,120.396 95.885,120.396 cw(c95.885,118.364) 97.917,118.364 97.917,78.613 cw(c95.377,78.613) 95.377,76.073 25.781,76.073 cw(c25.781,78.867) 22.987,78.867 22.987,118.237 cw(c25.146,118.237)

## Silkscreen, mask and mechanical layers (free items; w line width, h text height)
Top Overlay:
  lines w0.254: 13.085,77.344 13.589,75.819 ; 13.204,119.254 13.716,120.777 ; 13.335,75.82 13.843,75.818 ; 13.462,120.778 13.97,120.776 ; 13.63,90.274 13.589,75.819 ; 13.675,106.322 13.716,120.777 ; 14.101,77.342 13.589,75.819 ; 14.22,119.252 13.716,120.777 ; 23.114,65.913 23.114,66.421 ; 24.638,65.659 23.114,66.167 ; 24.638,66.675 23.114,66.167 ; 52.873,66.167 23.114,66.167 ; 68.92,66.167 98.679,66.167 ; 97.155,65.659 98.679,66.167 ; 97.155,66.675 98.679,66.167 ; 98.679,65.913 98.679,66.421
  text "VIN TP" at 50.927,113.792 h1.5
  text "VIN +" at 24.13,112.776 h2 r270
  text "GND-" at 24.414,107.061 h2 r270
  text "VOUT TP" at 85.598,96.393 h1.5
  text "GND TP" at 50.927,96.266 h1.5
  text "44.958 (mm)" at 14.545,90.526 h1.52 r89.84
  text "A+" at 24.511,89.916 h1.52 r270
  text "K-" at 24.511,87.249 h1.52 r270
  text "VOUT+" at 97.028,85.471 h2 r90
  text "FB" at 24.511,84.709 h1.52 r270
  text "G" at 24.511,82.169 h1.52 r270
  text "GND-" at 96.744,80.518 h2 r90
  text "75.565 (mm)" at 53.127,65.253 h1.52
Mechanical 1:
  lines w0.1: 22.733,78.319 ccw(c25.233,78.319) 25.233,75.819 95.798,75.819 ccw(c95.798,78.319) 98.298,78.319 98.298,118.404 ccw(c95.925,118.404) 95.925,120.777 25.215,120.777 ccw(c25.215,118.295) 22.733,118.295 22.733,78.319